# Altium PCB SCE5x5.PcbDoc
Units mm, origin at the board's own origin, x right, y up, seen from the top; angles counter-clockwise.
Board outline 50.38 x 50.25 mm, 2 copper layers (Top Layer, Bottom Layer); 5 components, 4 nets, 16 pads, 0 vias.
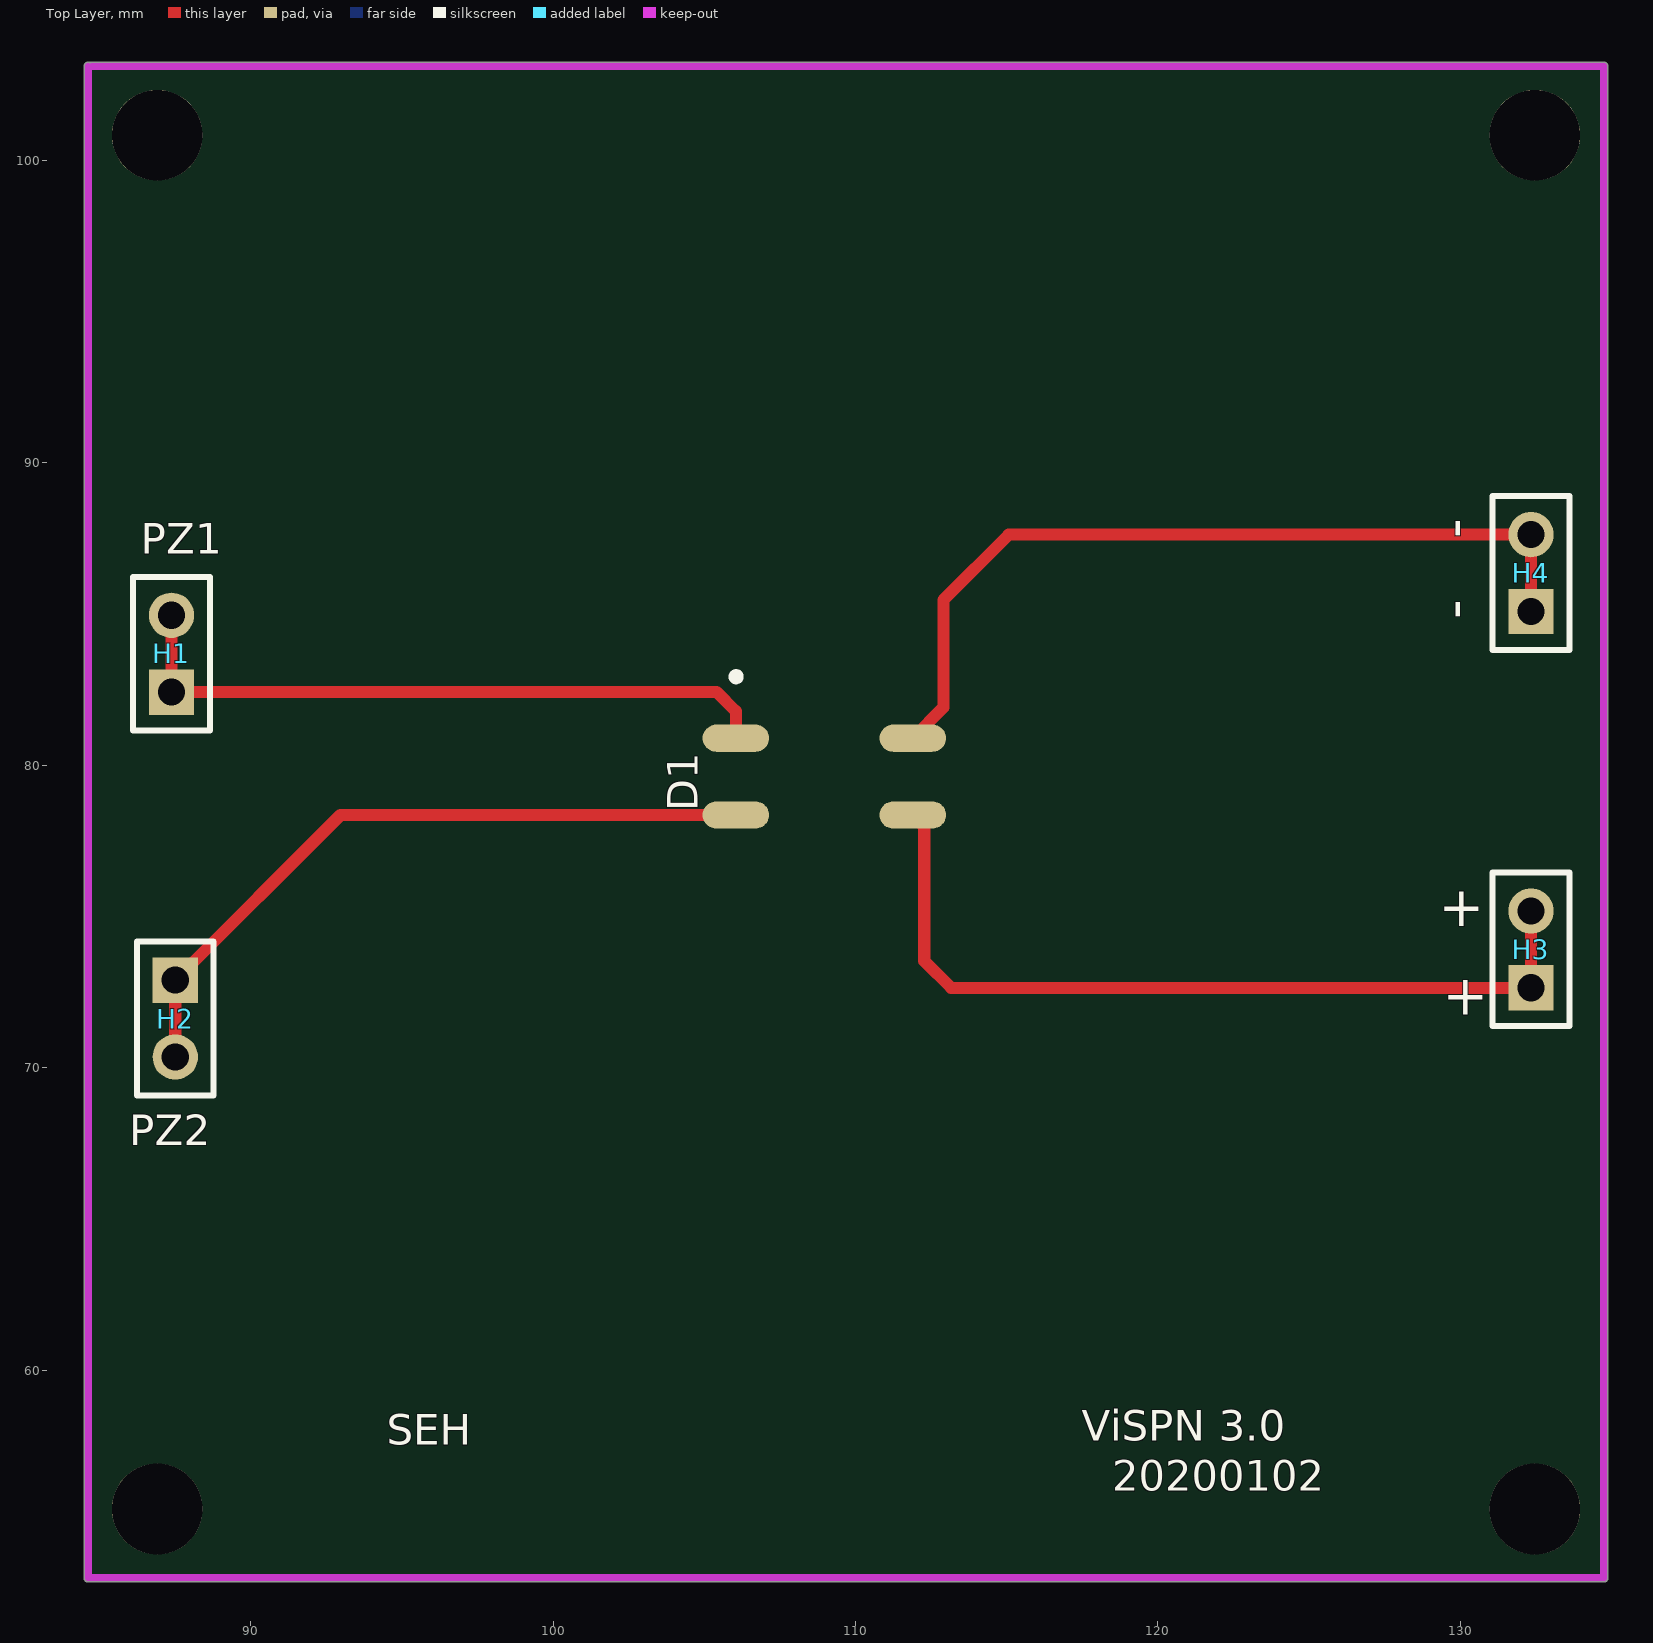
[diagram p0: Top Layer view]
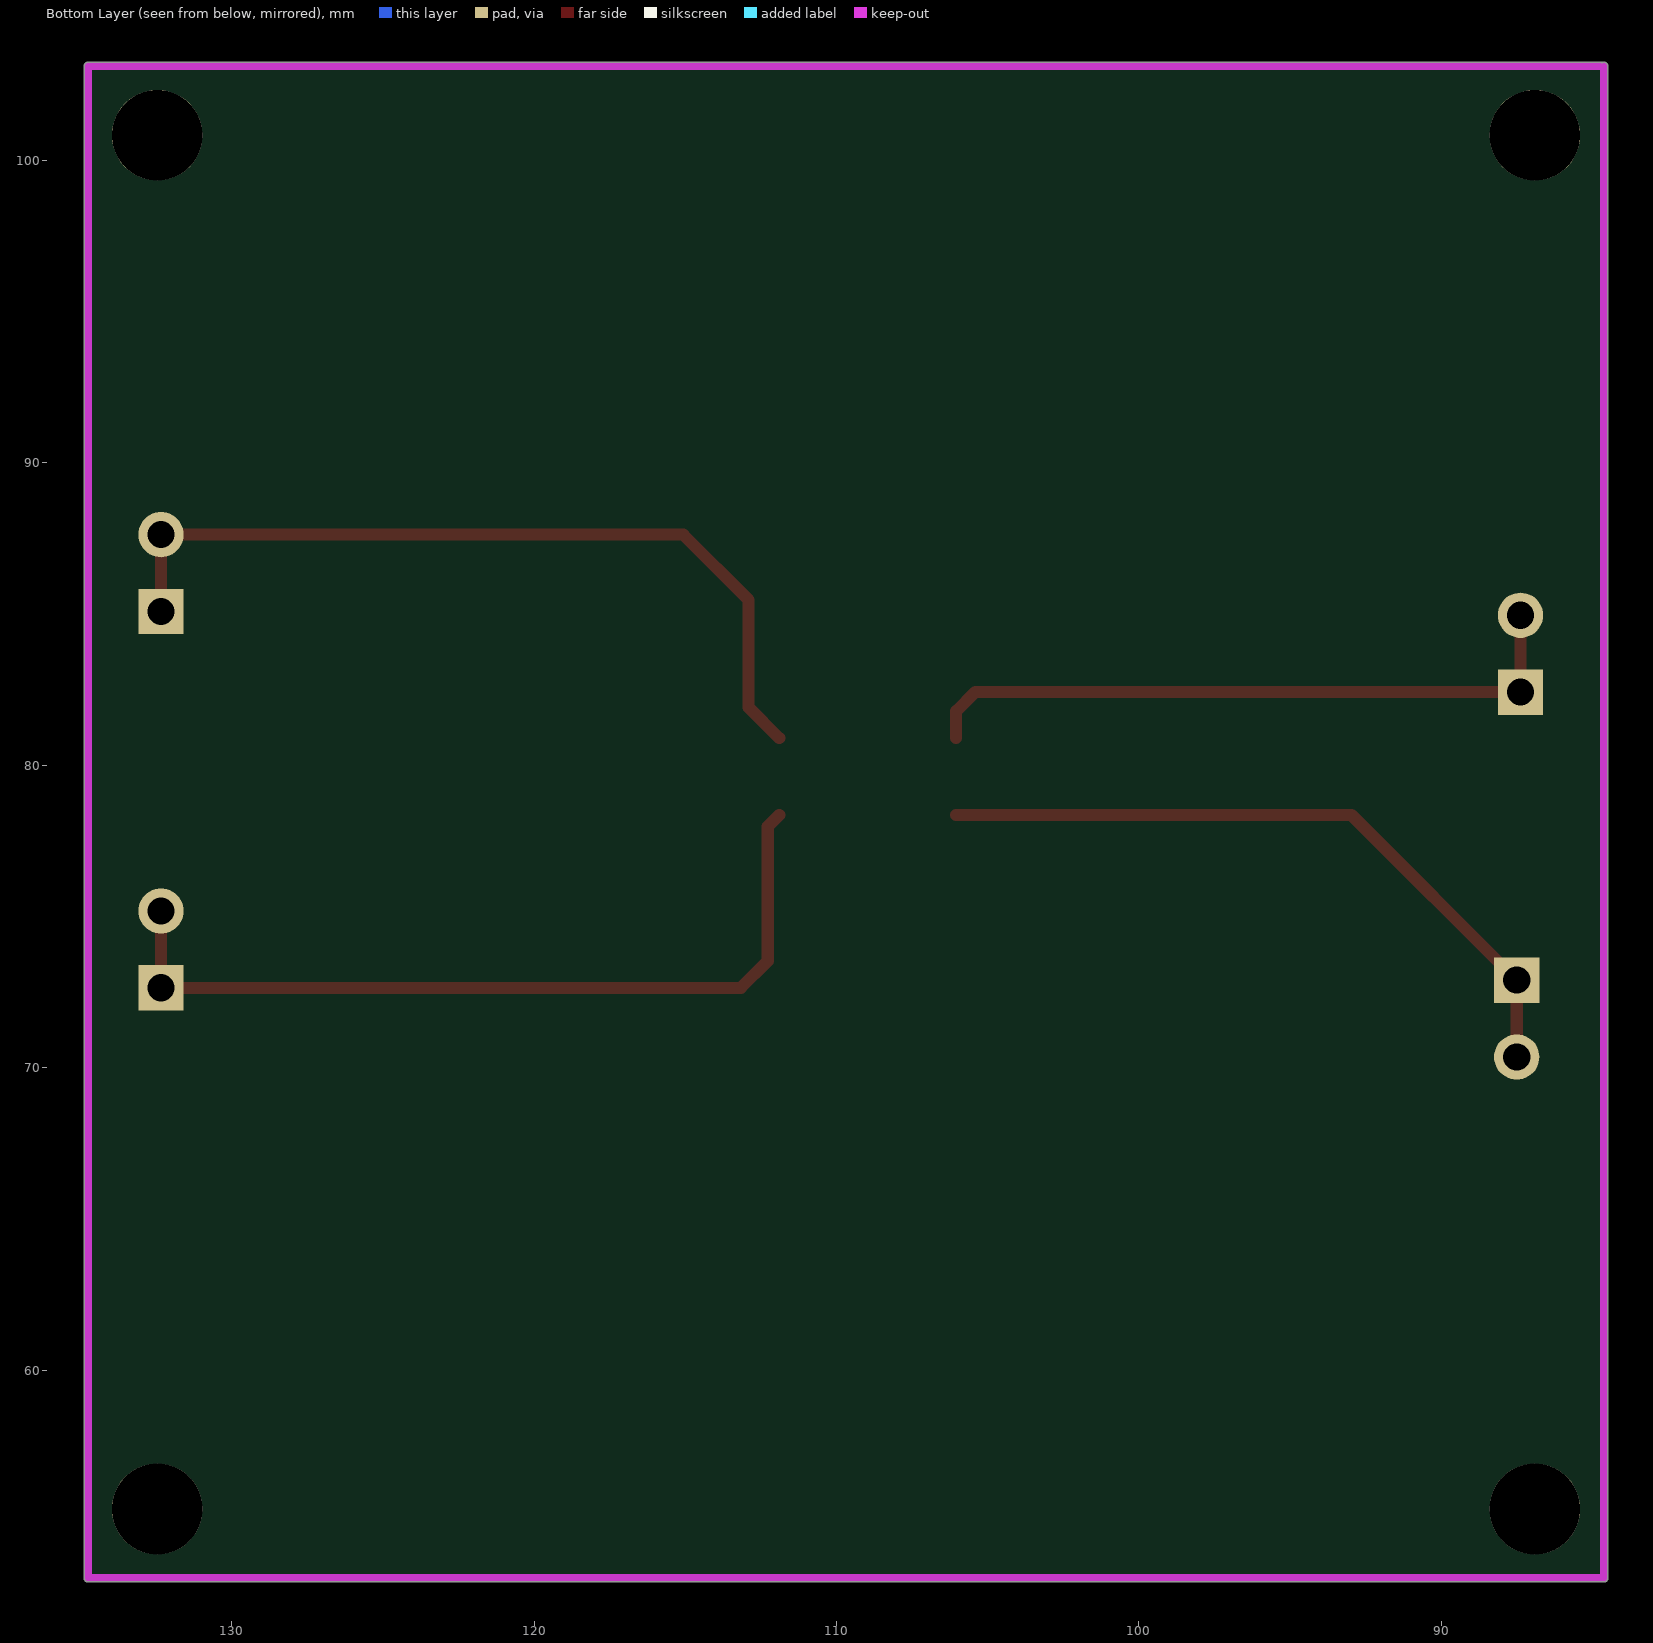
[diagram p1: Bottom Layer view, seen from below]

## Layer stack, top to bottom
Top Layer: signal copper 0.0356
Dielectric: dielectric 0.32, FR-4, Dk 4.8
Bottom Layer: signal copper 0.0356

## Board outline
84.492,53.125 ccw(c84.619,53.125) 84.619,52.997 134.746,52.997 ccw(c134.746,53.125) 134.874,53.125 134.874,103.125 ccw(c134.746,103.125) 134.735,103.251 84.746,103.251 ccw(c84.746,103.124) 84.683,103.235 ccw(c84.619,103.125) 84.492,103.125

## Design rules (kind name [scope] priority, off if disabled: settings)
Clearance [All] p1: gap=0.254
PolygonConnect [All] p1: connectstyle=Relief reliefconductorwidth=0.254 reliefentries=4 polygonreliefangle="90 Angle" airgapwidth=0.254
RoutingVias [All] p1: holewidth=0.711 width=1.27 viastyle="Through Hole" minholewidth=0.711 minwidth=1.27 maxholewidth=0.711 maxwidth=1.27
SilkToSilkClearance [All] p1: silktosilkclearance=0
SolderMaskExpansion [All] p1: expansion=0.102
Width [All] p1: maxlimit=0.4 minlimit=0.4 preferedwidth=0.4
27 further rules are at their usual default settings.

## Components (designator, comment, footprint, x,y, rotation, side; value= is the part's Value field where it differs from the comment)
D1 "MB6S" MB6S 108.966,79.629 r0 top
H1 "Header1*2" HDR1X2 87.376,82.423 r90 top
H2 "Header1*2" HDR1X2 87.503,72.898 r270 top
H3 "Header1*2" HDR1X2 132.334,72.644 r90 top
H4 "Header1*2" HDR1X2 132.334,85.09 r90 top

## Footprints (in the part's own frame and the unit in brackets; to place one, negate y for a bottom-side part, rotate by r counter-clockwise, add the part's x,y. Pads: shape width x height; smd on the part's side, far side on the other; paste and mask are expansions set on the pad)
HDR1X2 [mm] "Connector; Header; 2 Position"
  rect 1.5x1.5 hole 0.9: 1(0,0)
  round 1.5 hole 0.9: 2(2.54,0)
  silkscreen extent -1.27,-1.27 3.81,1.27
MB6S [mm] "SOP127P600-8N"
  oval 2.2x0.9 smd: 1(-2.925,1.27) 2(-2.925,-1.27) 3(2.925,-1.27) 4(2.925,1.27)
  silkscreen extent -3.04,3.18 -2.79,3.43, body extent -2.05,-2.47 2.05,2.47, height 2.9

## Part data
D1: "Diode Bridge"

## Free pads (board coordinates)
  round 3 hole 3: 4(86.905,100.838) 5(132.461,100.838) 6(86.905,55.411) 7(132.46,55.411)

## Nets (pads, with @x,y where several pads share a name; then routed paths per layer and width w, separated by ;. In a path a pad name is that pad's centre, name@x,y a point inside that pad or via, vN(x,y) a via of type N, cw(c..) or ccw(c..) an arc to the next point about the centre after c; other vN are vias at no path point)
GND: D1.4 H4.1 H4.2 | length 27.9
  Top Layer w0.4: D1.4 112.903,81.911 112.903,85.467 115.066,87.63 H4.2 H4.1
PZ1: D1.1 H1.1 H1.2 | length 22.4
  Top Layer w0.4: H1.2 H1.1 105.406,82.423 106.041,81.788 D1.1
PZ2: D1.2 H2.1 H2.2 | length 23.3
  Top Layer w0.4: H2.2 H2.1 92.964,78.359 D1.2
VOUT: D1.3 H3.1 H3.2 | length 28
  Top Layer w0.4: D1.3 112.272,77.978 112.272,73.533 113.161,72.644 H3.1 H3.2

## Keep-outs
Keep-Out Layer:
  lines w0.254: 84.619,103.125 84.619,53.125 134.746,53.125 134.746,103.125 84.746,103.124

## Silkscreen, mask and mechanical layers (free items; w line width, h text height)
Top Overlay:
  text "-" at 130.429,87.503 h1.32 r90
  text "PZ1" at 86.36,86.995 h1.02
  text "-" at 130.429,84.836 h1.32 r90
  text "+" at 129.286,74.676 h1.32
  text "+" at 129.413,71.755 h1.32
  text "PZ2" at 85.979,67.437 h1.02
  text "ViSPN 3.0" at 117.475,57.658 h1.02
  text "SEH" at 94.488,57.531 h1.02
  text "20200102" at 118.491,56.007 h1